# Altium PCB Tag201_Rev4.PcbDoc
Units mil, origin at the board's own origin, x right, y up, seen from the top; angles counter-clockwise.
Board outline 1077.53 x 989.03 mil, 2 copper layers (Top Layer, Bottom Layer); 24 components, 16 nets, 73 pads, 20 vias.
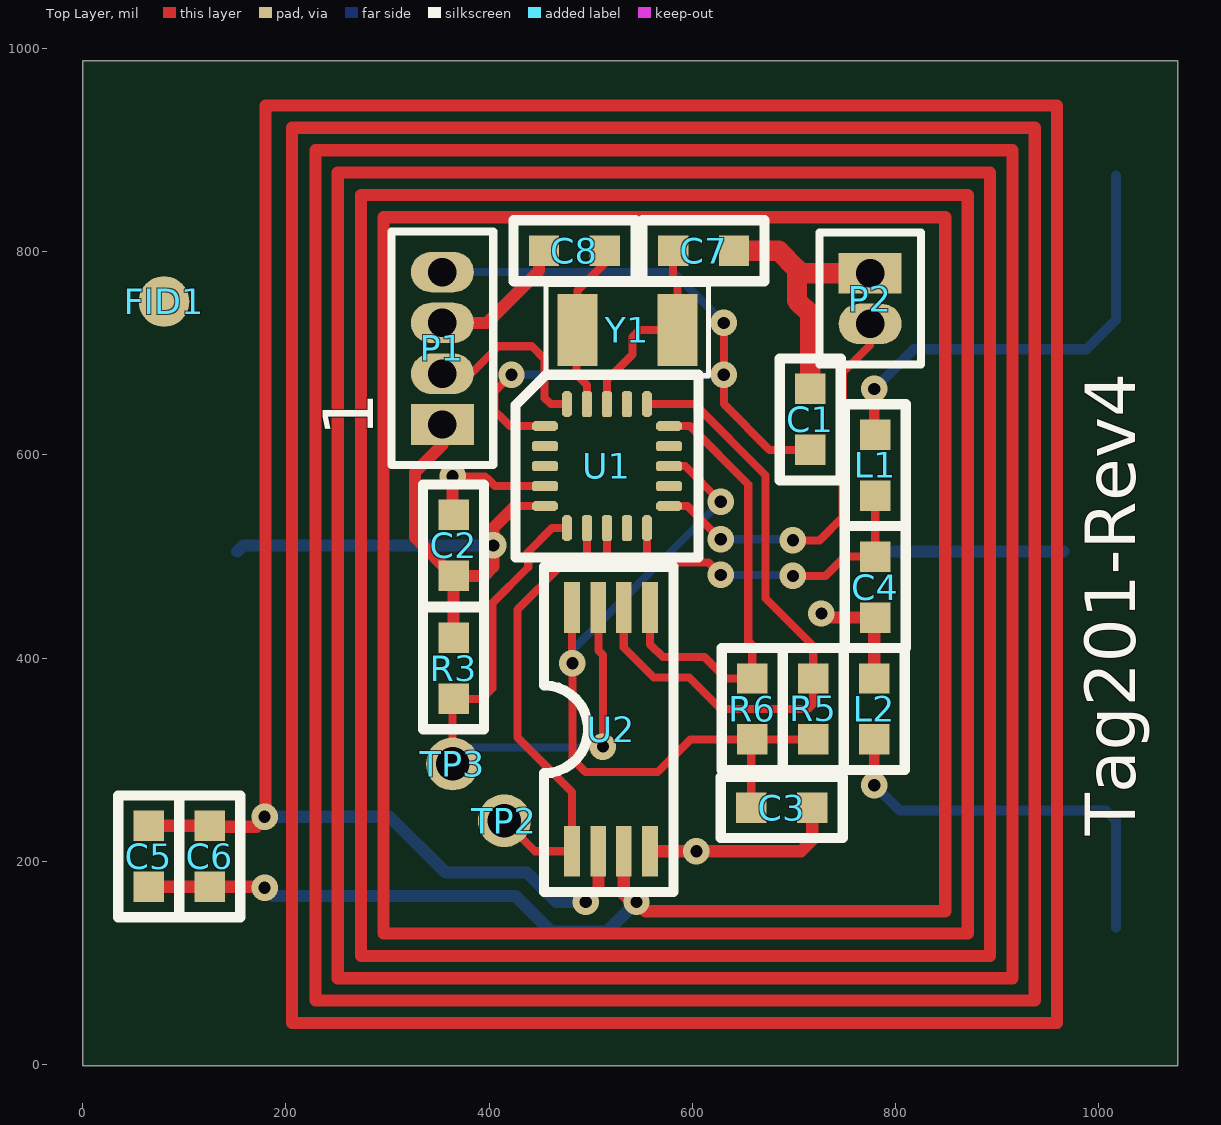
[diagram p0: Top Layer view]
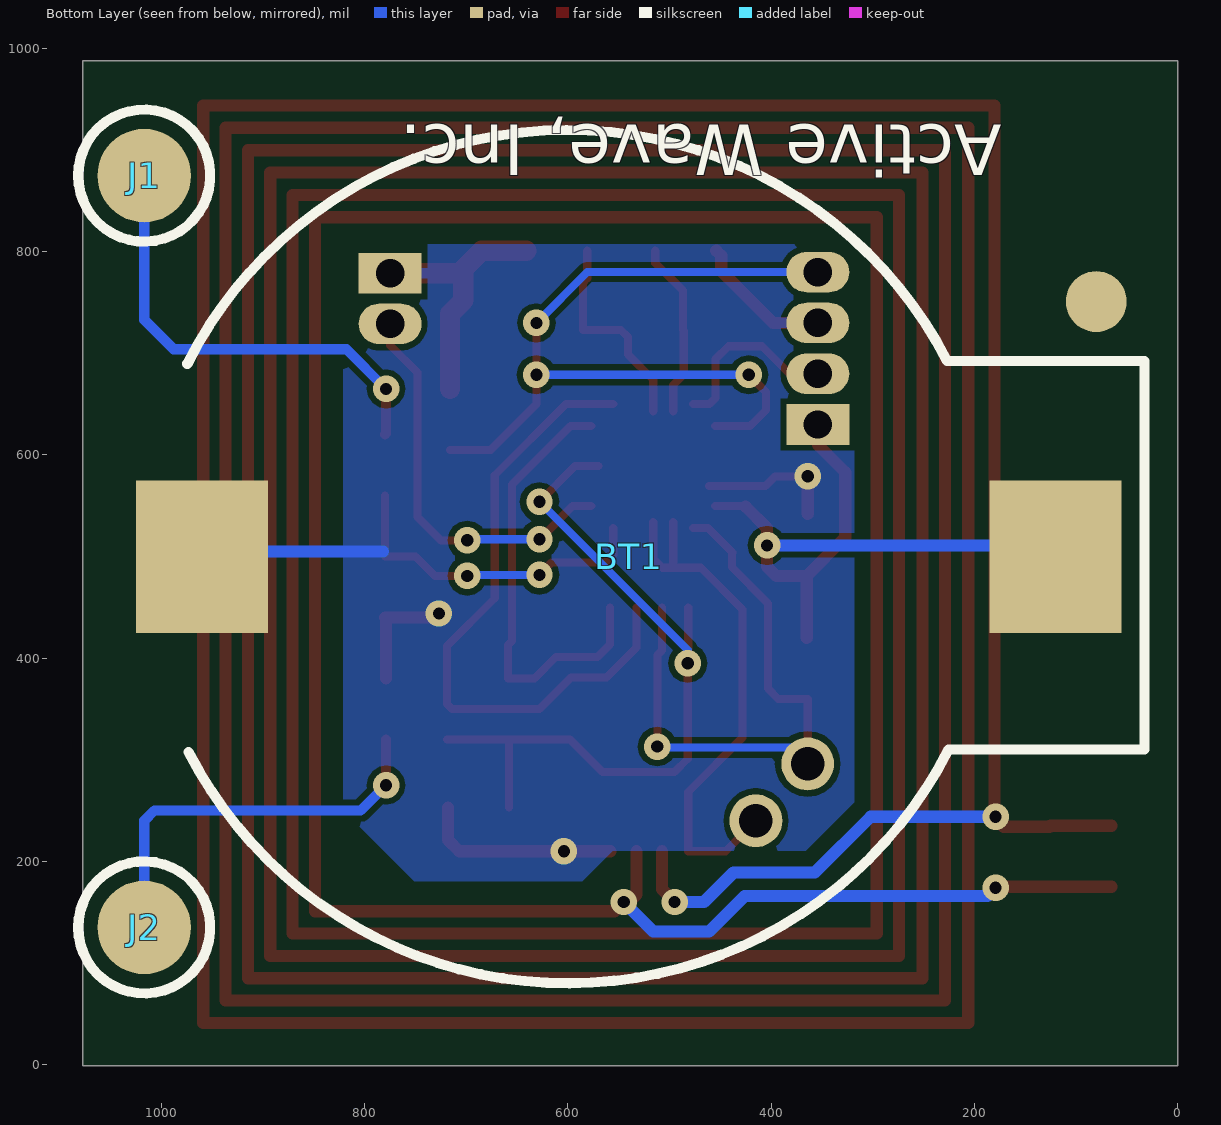
[diagram p1: Bottom Layer view, seen from below]

## Layer stack, top to bottom
Top Layer: signal copper 1.4
Dielectric: dielectric 12.6, FR-4, Dk 4.8
Bottom Layer: signal copper 1.4

## Board outline
0,-1 0,988.03 1077.53,988.03 1077.53,-1

## Design rules (kind name [scope] priority, off if disabled: settings)
Clearance [All] p1: gap=6
FabricationTestpoint [(IsPad And (OnTopLayer Or OnBottomLayer))] p1: side=3 testpointundercomponent=TRUE minsize=40 maxsize=100 preferedsize=60 minholesize=0 maxholesize=40 preferedholesize=32 testpointgrid=1 allowsidetop=TRUE allowsidebottom=TRUE usegrid=TRUE gridtolerance=0.01
HoleSize [All] p1: absolutevalues=TRUE maxlimit=100 minlimit=12 maxpercent=80.000 minpercent=20.000
MinimumSolderMaskSliver [All] p1: minsoldermaskwidth=5
PolygonConnect PolygonConnectVia [All vs IsVia] p1: connectstyle=Direct reliefconductorwidth=10 reliefentries=4 polygonreliefangle="90 Angle"
PolygonConnect [All] p2: connectstyle=Relief reliefconductorwidth=10 reliefentries=4 polygonreliefangle="90 Angle"
RoutingVias [All] p1: holewidth=12 width=20 viastyle="Through Hole" minholewidth=12 minwidth=26 maxholewidth=28 maxwidth=50
SilkToSilkClearance [All] p1: silktosilkclearance=2
SilkscreenOverComponentPads [All] p1: minsilkscreentomaskgap=2
SolderMaskExpansion [All] p1: expansion=4
Width [All] p1: maxlimit=50 minlimit=8 preferedwidth=10
23 further rules are at their usual default settings.

## Components (designator, comment, footprint, x,y, rotation, side; value= is the part's Value field where it differs from the comment)
BT1 "BATTERY" COINCELL2_040912 600,500 r0 bottom
C1 "0.01uf" 0603_072205 716,635 r90 top
C2 "0.1uf" 0603_072205 365,511 r90 top
C3 "0.01uf" 0603_072205 688,253 r0 top
C4 "0.01uf" 0603_072205 780,470 r270 top
C5 "30 pF" 0603_072205 65,205 r270 top
C6 "68 pF" 0603_072205 125,205 r90 top
C7 "6.2  pF" 0603_072205 611,801 r0 top
C8 "6.2 pF" 0603_072205 484,801 r180 top
FID1 "FIDUCIAL" FiducialTwoSide_020205 80,751 r90 top
J1 "POGOPIN" MilMax0910Pad_040912 1017,875 r180 bottom
J2 "POGOPIN" MilMax0910Pad_040912 1017,135 r180 bottom
L1 "BEAD" 0603_072205 780,590 r90 top
L2 "BEAD" 0603_072205 779,350 r270 top
P1 "1x4 50mil" "1X4 HEADER_50mil_071411" 354,630 r90 top
P2 "Value" "1X2 HEADER_50MIL_081611" 775,779 r270 top
R3 "10K" 0603_072205 365,390 r270 top
R5 "3.9K" 0603_072205 719,350 r90 top
R6 "3.9K" 0603_072205 659,350 r90 top
TP2 "TESTPOINT" TestPoint52x32 415,240 r90 top
TP3 "TESTPOINT" TestPoint52x32 364,296 r90 top
U1 "STM8L151F2" UFQFPN20ALT_041512 516,589 r0 top
U2 "M24LR16E" TSSOP08_022410 520,330 r90 top
Y1 "32.768K" CRYSTAL32K_3.2mmx1.5mm_040912 536,723 r180 top

## Footprints (in the part's own frame and the unit in brackets; to place one, negate y for a bottom-side part, rotate by r counter-clockwise, add the part's x,y. Pads: shape width x height; smd on the part's side, far side on the other; paste and mask are expansions set on the pad)
"1X2 HEADER_50MIL_081611" [mil] "TH"
  rect 40x62 hole 28 mask+2: 1(0,0)
  oval 40x62 hole 28 mask+2: 2(50,0)
  silkscreen extent -40,-50 90,50
"1X4 HEADER_50mil_071411" [mil] "TH"
  rect 40x62 hole 28 mask+2: 1(0,0)
  oval 40x62 hole 28 mask+2: 2(50,0) 3(100,0) 4(150,0)
  silkscreen extent -40,-50 190,50
0603_072205 [mil] "SM"
  rect 30x30 smd: 1(-30,0) 2(30,0)
  silkscreen extent -60,-30 60,30
COINCELL2_040912 [mil] "SMT"
  rect 130x150 smd: 1(-480,0) 2(360,0)
  silkscreen extent -568,-420 375,420
CRYSTAL32K_3.2mmx1.5mm_040912 [mm] "SMT"
  rect 1x1.8 smd: 1(-1.25,0) 2(1.25,0)
  silkscreen extent -2.03,-1.14 2.03,1.14
FiducialTwoSide_020205 [mil] "FEATURE SMT PCB"
  round 50 smd: 0(0,0)
  round 60 smd far side paste+0 mask+0: 0(0,0)
  round 70 on Top Solder: 0(0,0)
  round 80 on Keep-Out: 0(0,0)
  round 80 on Bottom Solder paste+0 mask+0: 1(0,0)
MilMax0910Pad_040912 [mil] "SMT"
  round 92 smd: 1(0,0)
  silkscreen extent -65,-65 65,65
TestPoint52x32 [mil] "SMT"
  round 52 hole 33: 1(0,0)
TSSOP08_022410 [mil] "SMT"
  rect 50x15.5 smd mask+1.5: 1(-120,38.4) 2(-120,12.5) 3(-120,-12.5) 4(-120,-38.4) 5(120,-38.4) 6(120,-12.5) 7(120,12.5) 8(120,38.4)
  silkscreen extent -160,-62 160,66
UFQFPN20ALT_041512 [mm] "SMT"
  oct 0.65x0.25 smd mask+0.051: 1(-1.55,1) 5(-1.55,-1) 11(1.55,-1) 15(1.55,1)
  rrect50% 0.65x0.25 smd mask+0.051: 2(-1.55,0.5) 3(-1.55,0) 4(-1.55,-0.5) 12(1.55,-0.5) 13(1.55,0) 14(1.55,0.5)
  oct 0.25x0.65 smd mask+0.051: 6(-1,-1.55) 10(1,-1.55) 16(1,1.55) 20(-1,1.55)
  rrect50% 0.25x0.65 smd mask+0.051: 7(-0.5,-1.55) 8(0,-1.55) 9(0.5,-1.55) 17(0.5,1.55) 18(0,1.55) 19(-0.5,1.55)
  silkscreen extent -2.29,-2.29 2.29,2.29

## Part data
BT1: library part Battery, "Multicell Battery"
C1 C2 C3 C4 C5 C6 C7 C8: library part Cap, "Capacitor"
FID1: library part FiducialOneSide040
J1 J2 TP2 TP3: library part CON1, "Connector"
L1 L2: library part "CHOKE RF", "COIL CHOKE 1UH SHIELDED SMD"
P1: library part "Header 4", "Header, 4-Pin"
P2: library part CON2
R3 R5 R6: library part RESISTOR
Y1: library part CRYSTAL

## Via types
v1: diameter 26, hole 12, Top Layer to Bottom Layer, tented both sides, 20 vias

## Nets (pads, with @x,y where several pads share a name; then routed paths per layer and width w, separated by ;. In a path a pad name is that pad's centre, name@x,y a point inside that pad or via, vN(x,y) a via of type N, cw(c..) or ccw(c..) an arc to the next point about the centre after c; other vN are vias at no path point)
BUSY: R3.2 TP3.1 U1.6 U2.7 | length 593.9
  Top Layer w8: R3.2@364,360 364,301 TP3.1@365,300 ; R3.2 393,360 403,370 403,454 438.48,489.48 438.48,503.52 438,504 461.98,527.98 U1.6 ; U2.7 507.5,407.5 512,403 v1(512,313)
  Bottom Layer w8: TP3.1 380,312 511,312 v1(512,313)
COMM: TP2.1 U1.7 U1.8 U2.1 | length 529.1
  Top Layer w8: TP2.1 445,210 U2.1 481.6,268.4 428,322 428,448 469,489 496,489 ; U1.7@496.31,534 496.31,489.31 496,489 ; U1.8@516,534 516,498 507,489 496,489
DEBUG: P1.2 U1.20 | length 179.9
  Top Layer w8: P1.2 382,680 409,707 442,707 454.63,694.37 454.63,656.02 460.63,650.02 U1.20
GND: BT1.2 C1.2 C2.2 C3.2 C4.2 C7.2 C8.2 L2.1 P1.3 P2.1 U1.4 U2.4 | length 1039.8
  Top Layer w8: C2.2@364,542 C2.2 ; v1(364,579) 396,579 399.69,575.31 405.69,569.31 U1.4@461,569.31
  Top Layer w12: P1.3 398,730 449,781 449,796 C8.2 ; C2.2@364,542 v1(364,579) ; U2.4 595,210 707,210 718,221 C3.2 ; v1(727,444) 731,440 C4.2 779,439 L2.1
  Top Layer w20: C7.2 685,801 703,783 ; 702,784 703,783 ; C1.2 716,739 703,752 703,783 ; P2.1 707,779 703,783
  Bottom Layer w12: 782,505 BT1.2@965,505
  other v1: 604,210
NetC5_1: C5.1 C5.2 C6.1 C6.2 U2.2 U2.3 | length 18130.8
  Top Layer w12: C5.2 C6.1 v1@179,175 ; C5.1 C6.2 126,234 171,234 v1@180,243 ; v1@180,244 180,944 959,944 959,41 206,41 206,922 937,922 937,63 229,63 229,900 915,900 915,85 251,85 251,878 893,878 893,107 274,107 274,856 871,856 871,129 296,129 296,834 849,834 849,151 554,151 v1(545,160) 540,160 532.5,167.5 U2.3 ; v1(495,160) 507.5,172.5 U2.2
  Bottom Layer w12: v1(179,174) 187,166 426,166 461,131 516,131 v1(545,160) ; v1(179,244) 302,244 357,189 437,189 466,160 v1(495,160)
NetC7_1: C7.1 U1.18 Y1.1 | length 210.2
  Top Layer w8: U1.18@516,643.06 516,674 541,699 541,716 548,723 Y1.1 585.21,769.79 581,774 C7.1
NetC8_1: C8.1 U1.19 Y1.2 | length 173.8
  Top Layer w8: U1.19@496.31,643.06 496.31,668.69 486,679 486,722.21 Y1.2 486.79,761.79 514,789 C8.1
NetJ1_1: J1.1 L1.2 | length 453.6
  Top Layer w10: v1(779,665) 779,621 L1.2
  Bottom Layer w10: v1(779,665) 818,704 988,704 1017,733 J1.1
NetJ2_1: J2.1 L2.2 | length 402.5
  Top Layer w10: v1(779,275) L2.2
  Bottom Layer w10: v1(779,275) 804,250 1007,250 1017,240 J2.1
PULLUP: C3.1 R5.1 R6.1 U1.13 U2.8 | length 763.6
  Top Layer w8: v1@481.6,395.4 U2.8 ; v1(482,395) 482,301 495,288 566,288 598,320 R6.1 ; U1.13@570.06,589 593,589 v1(628,554) ; C3.1 658,319 R6.1 ; R5.1 R6.1
  Bottom Layer w8: v1(482,395) 482,408 v1(628,554)
RESET: C1.1 P1.4 U1.1 | length 788.8
  Top Layer w8: v1(422,679) 405,662 405,644 414.63,634.37 420.63,628.37 U1.1 ; v1(631,730) v1(631,679) 631,650 676,605 C1.1
  Bottom Layer w8: P1.4 581,780 v1(631,730) ; v1(422,679) v1(631,679)
SCL: R5.2 U1.16 U2.6 | length 643.2
  Top Layer w8: U2.6 532.5,410.5 562,381 597,381 628,350 714,350 719,355 R5.2 719,412 672,459 672,580 601.98,650.02 U1.16
SDA: R6.2 U1.15 U2.5 | length 445.3
  Top Layer w8: U2.5 558.4,413.6 571,401 612,401 633,380 R6.2 659,413 655,417 655,571 597.63,628.37 U1.15
"TESTING RESULT": P2.2 U1.11 | length 395.6
  Top Layer w8: U1.11 595.37,549.63 v1(628,517) ; v1(699,516) 725,516 748,539 748,681 775,708 P2.2
  Bottom Layer w8: v1(628,517) 698,517 v1(699,516)
VCC: BT1.1 C2.1 P1.1 R3.1 U1.5 | length 631.2
  Top Layer w8: 425.63,549.63 U1.5
  Top Layer w12: P1.1 354,610 327,583 327,519 C2.1 ; R3.1 C2.1 ; 425,549 404,528 v1(404,511) 404,490 395,481 C2.1
  Bottom Layer w12: BT1.1@152,505 158,511 v1(404,511)
WRIST: C4.1 L1.1 U1.10 | length 330.4
  Top Layer w8: U1.10 555.37,501.63 563,494 616,494 v1(628,482) v1@625,482 ; v1(699,481) 731,481 750,500 C4.1 L1.1
  Bottom Layer w8: v1(628,482) 698,482 v1(699,481)
pads on no net: FID1.0 FID1.1 U1.2 U1.3 U1.9 U1.12 U1.14 U1.17

## Polygon pours and split planes (outlines as drawn)
GND on Bottom Layer "GND_BOT" (solid, remove dead copper, pour order 2): 366,210.37 318,258.37 318,751.37 374,807.37 756,807.37 821,742.37 821,250.37 751,180.37 586,180.37 556,210.37

## Other copper
Top Layer:
  text "TOP LAYER" at 1012,-1755 h100
Bottom Layer:
  text "BOTTOM" at 1752,-1755 h100

## Silkscreen, mask and mechanical layers (free items; w line width, h text height)
Top Overlay:
  text "1" at 286,618 h50 r90
  text "Tag201-Rev4" at 1036,225 h50 r90
  text "TOP SILK" at 1027,-1755 h100
Bottom Overlay:
  text "Active Wave, Inc." at 173,925 h50 r180
  text "BOTTOM SILK" at 2092,-1750 h100
Top Paste:
  text "TOP PASTE" at 982,-1750 h100
Top Solder:
  text "TOP MASK" at 1142,-1755 h100
Bottom Solder:
  text "BOTTOM MASK" at 2027,-1750 h100
AssemblyTop:
  text "TOP ASSEMBLY" at 907,-1755 h100
Outline:
  lines w10: 0,988 0,-1 1077.53,-1 1077.53,988.03 0,988.03 ; 1146.95,-1724.98 1186.32,-1724.98
Title:
  lines w10: -1467.6,-1750.14 -1467.6,-650.14 cw(c-1367.6,-650.14) -1367.6,-550.14 2832.4,-550.14 ; -1467.6,-1749.14 ccw(c-1366.6,-1749.14) -1368.37,-1850.13 ; -1368.48,-1800.13 cw(c-1367.6,-1750.14) -1417.6,-1750.14 -1417.6,-1650.14 cw(c-1367.6,-1650.14) -1367.6,-1600.14 307.4,-1600.14 cw(c307.4,-1650.14) 357.4,-1650.14 357.4,-1750.14 ; -1368.48,-1550.13 cw(c-1367.6,-1500.14) -1417.6,-1500.14 -1417.6,-1275.14 cw(c-1367.6,-1275.14) -1367.6,-1225.14 -617.6,-1225.14 ; -1367.6,-1850.14 2832.4,-1850.14 ccw(c2832.4,-1750.14) 2932.4,-1750.14 2932.4,-650.14 ; -1367.6,-1800.14 307.4,-1800.14 ; -1367.6,-1550.14 -617.6,-1550.14 ; -618.31,-1225.17 cw(c-616.6,-1274.14) -567.6,-1274.14 ; -617.6,-1175.14 -1367.6,-1175.14 cw(c-1367.6,-1125.14) -1417.6,-1125.14 -1417.6,-900.14 cw(c-1367.6,-900.14) -1367.6,-850.14 -617.6,-850.14 ; -616.6,-1550.14 ccw(c-616.6,-1501.14) -567.6,-1501.14 ; -616.6,-850.14 cw(c-616.6,-899.14) -567.6,-899.14 ; -615.6,-1175.14 ccw(c-615.6,-1127.14) -567.6,-1127.14 ; -567.6,-1500.14 -567.6,-1275.14 ; -567.6,-1125.14 -567.6,-900.14 ; -517.6,-1501.14 ccw(c-468.6,-1501.14) -468.6,-1550.14 ; -517.6,-1500.14 -517.6,-1375.14 cw(c-467.6,-1375.14) -467.6,-1325.14 1132.4,-1325.14 ; -517.6,-1226.14 ccw(c-468.6,-1226.14) -468.6,-1275.14 ; -517.6,-1225.14 -517.6,-900.14 cw(c-467.6,-900.14) -467.6,-850.14 1582.4,-850.14 cw(c1582.4,-900.14) 1632.4,-900.14 1632.4,-1225.14 cw(c1582.4,-1225.14) 1583.27,-1275.14 ; -467.6,-1550.14 1132.4,-1550.14 ; -467.6,-1275.14 1582.4,-1275.14 ; 308.56,-1800.14 ccw(c309.4,-1752.14) 357.38,-1750.47 ; 456.52,-1800.13 cw(c457.4,-1750.14) 407.4,-1750.14 407.4,-1650.14 cw(c457.4,-1650.14) 457.4,-1600.14 2132.4,-1600.14 cw(c2132.4,-1650.14) 2182.4,-1650.14 2182.4,-1750.14 ; 457.4,-1800.14 2132.4,-1800.14 ; 1133.4,-1550.14 ccw(c1133.4,-1501.14) 1182.39,-1500.29 ; 1133.4,-1325.14 cw(c1133.4,-1374.14) 1182.4,-1374.14 ; 1182.4,-1500.14 1182.4,-1375.14 ; 1232.4,-1500.14 1232.4,-1375.14 ; 1232.4,-1499.14 ccw(c1283.4,-1499.14) 1282.51,-1550.13 ; 1232.46,-1375.65 cw(c1280.4,-1373.14) 1280.4,-1325.14 ; 1282.4,-1550.14 1582.4,-1550.14 ccw(c1582.4,-1500.14) 1632.4,-1500.14 1632.4,-1375.14 ; 1282.4,-1325.14 1582.4,-1325.14 ; 1583.4,-1325.14 cw(c1583.4,-1374.14) 1632.4,-1374.14 ; 1682.4,-1501.14 ccw(c1731.4,-1501.14) 1732.25,-1550.13 ; 1682.4,-1500.14 1682.4,-1375.14 cw(c1732.4,-1375.14) 1732.4,-1325.14 2832.4,-1325.14 ; 1732.4,-1550.14 2832.4,-1550.14 ; 2133.56,-1800.14 ccw(c2134.4,-1752.14) 2182.38,-1750.47 ; 2232.4,-1751.14 ccw(c2281.4,-1751.14) 2282.25,-1800.13 ; 2232.4,-1750.14 2232.4,-1650.14 cw(c2282.4,-1650.14) 2282.4,-1600.14 2832.4,-1600.14 cw(c2832.4,-1650.14) 2882.4,-1649.27 ; 2282.4,-1800.14 2832.4,-1800.14 ccw(c2832.4,-1750.14) 2882.4,-1750.14 2882.4,-1650.14 ; 2831.67,-599.6 cw(c2833.38,-648.57) 2882.38,-648.57 ; 2832.4,-1275.14 1732.4,-1275.14 cw(c1732.4,-1225.14) 1682.4,-1225.14 1682.4,-650.14 cw(c1732.4,-650.14) 1732.4,-600.14 2832.4,-600.14 ; 2832.38,-549.57 cw(c2832.38,-649.57) 2932.38,-649.57 ; 2833.06,-1549.4 ccw(c2833.06,-1499.4) 2883.06,-1499.4 2883.06,-1373.4 ccw(c2834.06,-1373.4) 2834.06,-1324.4 ; 2833.06,-1274.4 ccw(c2833.06,-1224.4) 2883.06,-1224.4 ; 2882.4,-1225.14 2882.4,-650.14 ; -1417.6,-750.14 ccw(c-1367.6,-750.14) -1367.6,-800.14 1582.4,-800.14 ccw(c1582.4,-750.14) 1632.4,-750.14 1632.4,-650.14 ccw(c1582.4,-650.14) 1582.4,-600.14 -1367.6,-600.14 ccw(c-1367.6,-650.14) -1417.6,-650.14 -1417.6,-750.14
  text "Active Wave" at -523,-750 h90
  text "TITLE:" at -480.1,-937.64 h50
  text "ENGINEER:" at -1367.6,-950.14 h50
  text "JCM II" at -989,-955 h50
  text "PHONE:" at -1367.6,-1137.64 h50
  text "TAG201" at -203,-1150 h115
  text "DRAWN by :" at -1367.6,-1330.14 h50
  text "JCM II" at -899,-1335 h50
  text "Approval" at -467.6,-1412.64 h50
  text "REV:" at 1269.9,-1412.64 h50
  text "DATE:" at 1732.4,-1412.64 h50
  text "04/09/2012" at 2158.75,-1459.46 h50
  text "4.0" at 1444.9,-1487.64 h50
  text "PHONE:" at -1367.6,-1512.64 h50
  text "FILE NAME:" at -1367.6,-1690.14 h50
  text "LAYER:" at 472.4,-1690.14 h50
  text "GERBER:" at 2292.4,-1690.14 h50
Notes:
  lines w8: 3983.72,-425.69 4558.72,-425.69
  text "Notes:" at 4008.74,-376.26 h100
  text "1) 0.031\" Thick 2 Layer Scored Panel" at 3193.72,-681.35 h100
  text "2) RoHS Compliant FR4 material /w 1oz. copper" at 3157.98,-889.43 h100
  text "3) Add White Silk Screen Over Tented Vias" at 3174,-1078 h100
  text "4) Green Solder Mask Both Sides" at 3182.66,-1303.26 h100
Panel:
  drawing of 174 lines, arcs and shapes, not listed
  text "5) Panel Fiducial is 75mil D SMT round pad on both sides" at 3177.66,-1518.26 h100
  text "of PCB with 150mil D solder mask clearance" at 3392.66,-1728.26 h100
  text "Panel" at 1110,-1745 h100
AssemblyBottom:
  text "BOTTOM ASSEMBLY" at 2167,-1745 h100
Mechanical 12:
  lines w10: -78,85 212,85 ; -43,860 242,860 ; 0,988 1078,0 ; 67,-40 67,180 ; 89,734 89,954 ; 852,134 1137,134 ; 947,875 1252,875 ; 1017,-195 1017,1110
Drill Drawing:
  text ".Legend" at 7944,-1514 h40
  text "DRILL" at 1092,-1760 h100

## Dimensions
-222,-223 to -221.53,6154.33 on Dimension
-222,-223 to 9924,-223 on Dimension
1077.53,-1 to 1077.53,988.03 on Dimension
0,-1 to 1077.53,-1 on Dimension
7749,6108 to 7837.36,6222.51 on Panel
9947.8,6047 to 10107.8,6052 on Panel
950,-184 to 849,-276 on Panel
9957,-103 to 10117,-98 on Panel
-246.53,6043.33 to -391.53,6043.33 on Panel
-247,-113 to -392,-113 on Panel
974,6128 to 902,6249 on Panel
7750,-176 to 7869,-320 on Panel
9945,987 to 10158,987 on Panel